# EAGLE board ShowStopper REV B (EAGLE 5.00)
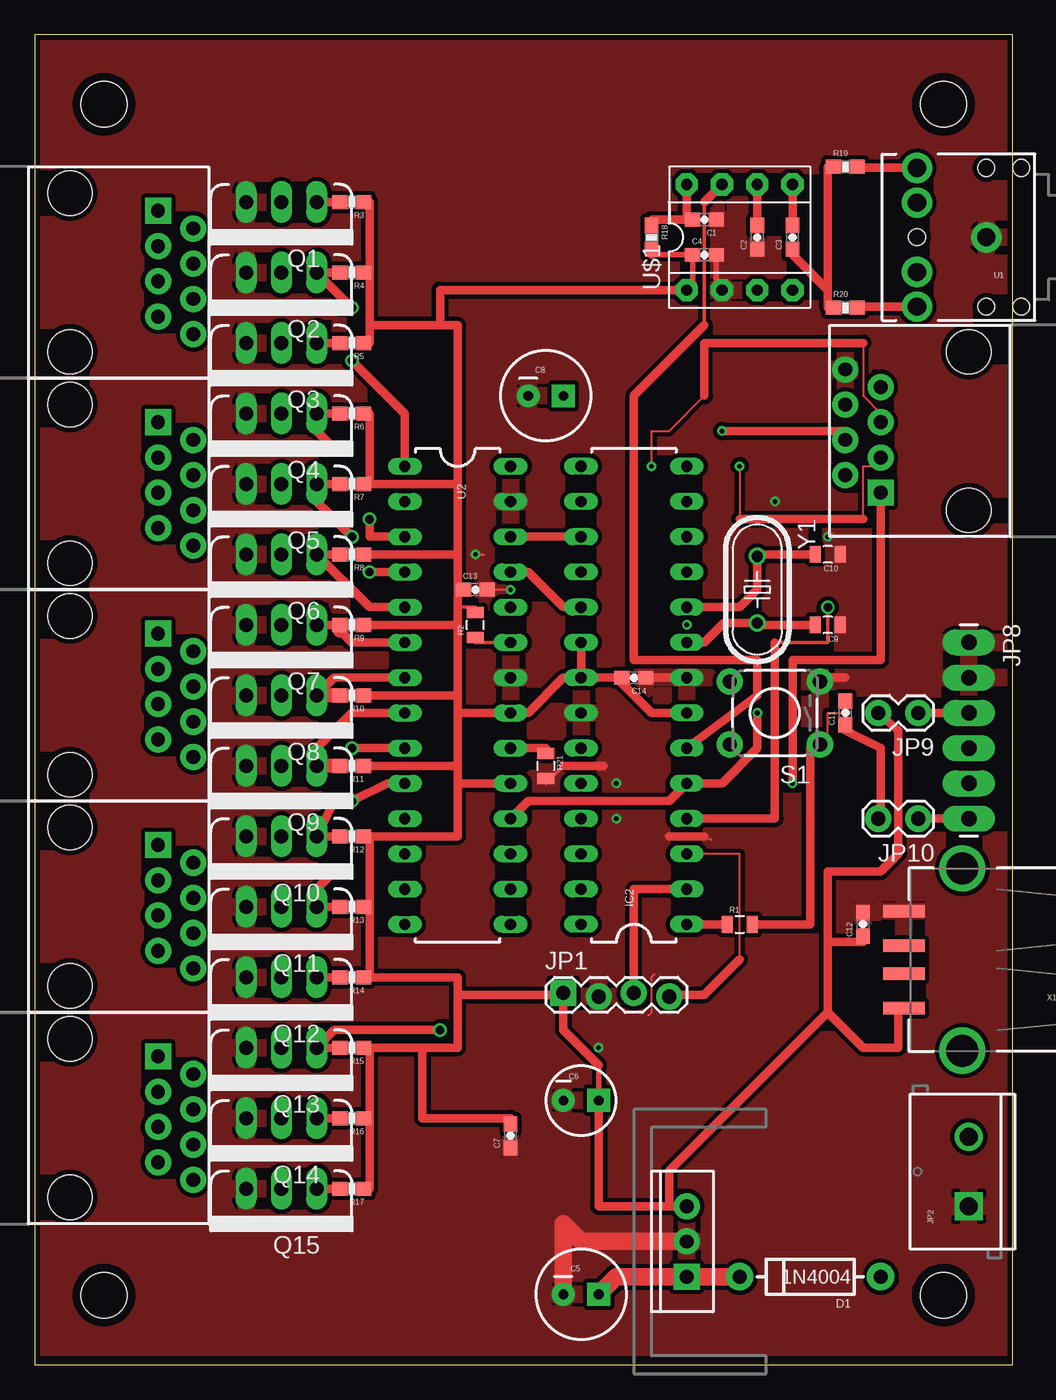
[diagram p0: board, top side]
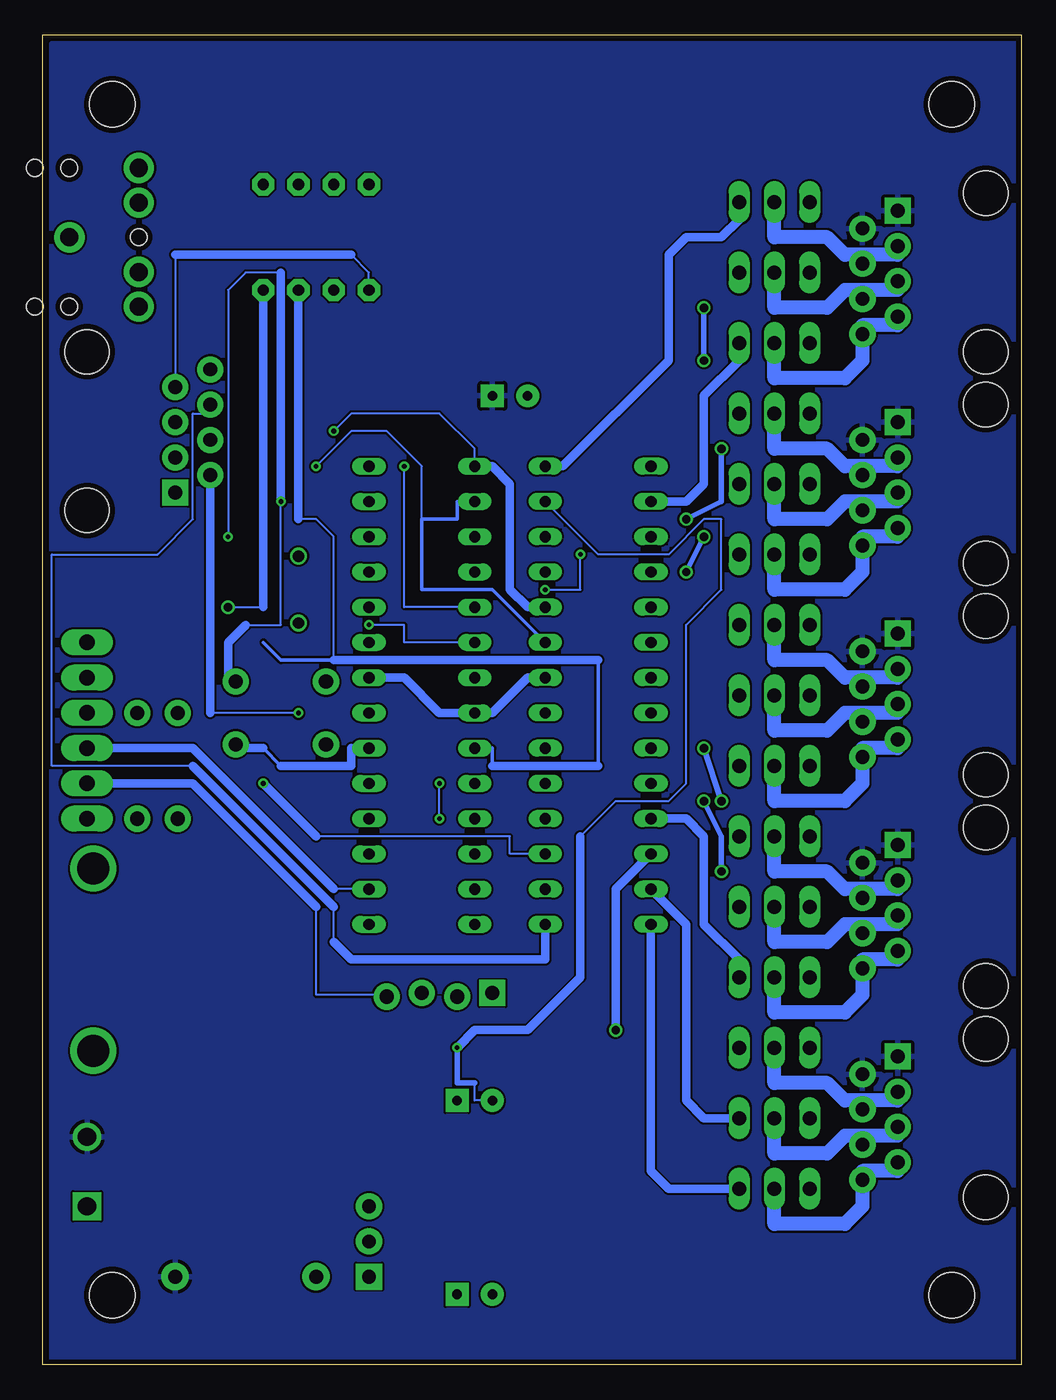
[diagram p1: board, bottom side, seen from below]

Size 70.48 x 95.89 mm. Coordinates in mm from the lower left corner, seen from the top.
Outline: 0,0 70.48,0 70.48,95.89 0,95.89 0,0
Copper layers (1*16): Top 0.0356mm / dielectric 1.5011mm / Bottom 0.0356mm
Design rules "LaenPCBOrder (1)": minimum track width 6mil, minimum drill 13mil, track to track 6mil, track to pad 6mil, pad to pad 6mil, via to via 6mil, smd to smd 6mil, copper to edge 15mil, drill to drill 6mil, minimum pad ring 7mil, minimum via ring 7mil, stop-mask expansion 4mil, vias tented up to drill 0mil, thermal gap 10mil

## Footprints (pad centres in the part's own frame; a part is rotated, then mirrored left to right if it is on the bottom)
0603-CAP = smd 1.1 x 1: 1 -0.85,0; 2 0.85,0
CPOL-RADIAL-100UF-25V = drill 0.7 pad 1.651 square: 1 1.27,0 | drill 0.7 pad 1.651 round: 2 -1.27,0
CPOL-RADIAL-10UF-25V = drill 0.7 pad 1.651 square: 1 1.27,0 | drill 0.7 pad 1.651 round: 2 -1.27,0
0805 = smd 0.8 x 1.2: 1 -0.9,0; 2 0.9,0
DIODE-1N4001 = drill 1 pad 1.981 round: A -5.08,0; C 5.08,0
RJ45-8 = drill 1 pad 1.88 square: 1 -4.445,6.35 | drill 1 pad 1.88 round: 2 -3.175,8.89; 3 -1.905,6.35; 4 -0.635,8.89; 5 0.635,6.35; 6 1.905,8.89; 7 3.175,6.35; 8 4.445,8.89 | hole 3.2: -5.715,0; 5.715,0
TO220-IGO = drill 1 pad 1.88 round: GND 0,0; OUT 2.54,0 | drill 1 pad 1.88 square: IN -2.54,0
DIL28-3 = drill 0.813 long: 1 -16.51,-3.81; 2 -13.97,-3.81; 3 -11.43,-3.81; 4 -8.89,-3.81; 5 -6.35,-3.81; 6 -3.81,-3.81; 7 -1.27,-3.81; 8 1.27,-3.81; 9 3.81,-3.81; 10 6.35,-3.81; 11 8.89,-3.81; 12 11.43,-3.81; 13 13.97,-3.81; 14 16.51,-3.81; 15 16.51,3.81; 16 13.97,3.81; 17 11.43,3.81; 18 8.89,3.81; 19 6.35,3.81; 20 3.81,3.81; 21 1.27,3.81; 22 -1.27,3.81; 23 -3.81,3.81; 24 -6.35,3.81; 25 -8.89,3.81; 26 -11.43,3.81; 27 -13.97,3.81; 28 -16.51,3.81
1X04_LOCK = drill 1.016 pad 1.88 square: 1 0,0.127 | drill 1.016 pad 1.88 round: 2 2.54,-0.127; 3 5.08,0.127; 4 7.62,-0.127
SCREWTERMINAL-5MM-2 = drill 1.3 pad 2.032 square: 1 0,0 | drill 1.3 pad 2.032 round: 2 5,0
STAND-OFF = hole 3.302: 0,0
1X06_LONGPADS = drill 1.118 pad 1.88 long: 1 0,0; 2 2.54,0; 3 5.08,0; 4 7.62,0; 5 10.16,0; 6 12.7,0
1X02_LOCK = drill 1.016 pad 1.88 round: 1 -0.178,0; 2 2.718,0
TO220V = drill 1.016 long: 1 -2.54,0; 2 0,0; 3 2.54,0
0603-RES = smd 1.1 x 1: 1 -0.85,0; 2 0.85,0
TACTILE-PTH = drill 1.016 pad 1.88 round: 1 -3.251,2.261; 2 3.251,2.261; 3 -3.251,-2.261; 4 3.251,-2.261
AUDIO-JACK = drill 1.3 pad 2.184 round: RING 5,5; RSH 5,2.5; SLEEVE 0,0; TIP 5,-5; TSH 5,-2.5 | hole 1.2: 0,5; -2.5,5; -2.5,-5; 0,-5; 5,0
DIL08 = drill 0.813 pad 1.6 octagon: 1 -3.81,-3.81; 2 -1.27,-3.81; 3 1.27,-3.81; 4 3.81,-3.81; 5 3.81,3.81; 6 1.27,3.81; 7 -1.27,3.81; 8 -3.81,3.81
USB-A-S-SILK-FEMALE = smd 3 x 0.9: D+ 7.212,-1; D- 7.212,1; GND 7.212,-3.5; VBUS 7.212,3.5 | drill 2.311 round: P$5 3,-6.566; P$6 3,6.566
HC49U-V = drill 0.813 round: 1 -2.413,0; 2 2.413,0

## Placement (x,y rotation side)
C1  33pf  [0603-CAP]  48.26,82.55 180 top
C2  .1uf  [0603-CAP]  52.07,81.28 90 top
C3  .01uf  [0603-CAP]  54.61,81.28 90 top
C4  .1uf  [0603-CAP]  48.26,80.01 0 top
C5  100uf  [CPOL-RADIAL-100UF-25V]  39.37,5.08 0 top
C6  10uf  [CPOL-RADIAL-10UF-25V]  39.37,19.05 0 top
C7  .1uf  [0603-CAP]  34.29,16.51 90 top
C8  100uf  [CPOL-RADIAL-100UF-25V]  36.83,69.85 0 top
C9  22PF  [0805]  57.15,53.34 180 top
C10  22PF  [0805]  57.15,58.42 180 top
C11  .1uf  [0603-CAP]  58.42,46.99 90 top
C12  .1uf  [0603-CAP]  59.69,31.75 90 top
C13  .1uf  [0603-CAP]  31.75,55.88 0 top
C14  .1uf  [0603-CAP]  43.18,49.53 180 top
D1  1N4004  [DIODE-1N4001]  55.88,6.35 180 top
EXT  RJ45-8PTH  [RJ45-8]  67.31,67.31 90 top
IC1  LM7805  [TO220-IGO]  46.99,8.89 90 top
IC2  AVR-MEGA8-PPTH  [DIL28-3]  43.18,48.26 90 top
JP1  BT  [1X04_LOCK]  38.1,26.67 0 top
JP2  [SCREWTERMINAL-5MM-2]  67.31,11.43 90 top
JP4  STAND-OFF  [STAND-OFF]  65.49,90.87 0 top
JP5  STAND-OFF  [STAND-OFF]  4.99,90.87 0 top
JP6  STAND-OFF  [STAND-OFF]  4.99,5.02 0 top
JP7  STAND-OFF  [STAND-OFF]  65.49,5.02 0 top
JP8  [1X06_LONGPADS]  67.31,52.07 270 top
JP9  [1X02_LOCK]  63.5,46.99 180 top
JP10  [1X02_LOCK]  63.5,39.37 180 top
Q1  [TO220V]  17.78,83.82 180 top
Q2  [TO220V]  17.78,78.74 180 top
Q3  [TO220V]  17.78,73.66 180 top
Q4  [TO220V]  17.78,68.58 180 top
Q5  [TO220V]  17.78,63.5 180 top
Q6  [TO220V]  17.78,58.42 180 top
Q7  [TO220V]  17.78,53.34 180 top
Q8  [TO220V]  17.78,48.26 180 top
Q9  [TO220V]  17.78,43.18 180 top
Q10  [TO220V]  17.78,38.1 180 top
Q11  [TO220V]  17.78,33.02 180 top
Q12  [TO220V]  17.78,27.94 180 top
Q13  [TO220V]  17.78,22.86 180 top
Q14  [TO220V]  17.78,17.78 180 top
Q15  [TO220V]  17.78,12.7 180 top
R1  10k  [0805]  50.8,31.75 0 top
R2  10k  [0805]  31.75,53.34 90 top
R3  10k  [0603-RES]  22.86,83.82 180 top
R4  10k  [0603-RES]  22.86,78.74 180 top
R5  10k  [0603-RES]  22.86,73.66 180 top
R6  10k  [0603-RES]  22.86,68.58 180 top
R7  10k  [0603-RES]  22.86,63.5 180 top
R8  10k  [0603-RES]  22.86,58.42 180 top
R9  10k  [0603-RES]  22.86,53.34 180 top
R10  10k  [0603-RES]  22.86,48.26 180 top
R11  10k  [0603-RES]  22.86,43.18 180 top
R12  10k  [0603-RES]  22.86,38.1 180 top
R13  10k  [0603-RES]  22.86,33.02 180 top
R14  10k  [0603-RES]  22.86,27.94 180 top
R15  10k  [0603-RES]  22.86,22.86 180 top
R16  10k  [0603-RES]  22.86,17.78 180 top
R17  10k  [0603-RES]  22.86,12.7 180 top
R18  200k  [0603-RES]  44.45,81.28 270 top
R19  22k  [0603-RES]  58.42,86.36 0 top
R20  22k  [0603-RES]  58.42,76.2 0 top
R21  2.2K  [0805]  36.83,43.18 270 top
S1  SWITCH-MOMENTARY-2PTH  [TACTILE-PTH]  53.34,46.99 180 top
U1  AUD0  [AUDIO-JACK]  68.58,81.28 180 top
U2  TLC5940-NT  [DIL28-3]  30.48,48.26 270 top
U$1  MSGEQ7_PTH  [DIL08]  50.8,81.28 0 top
U$3  RJ45-8PTH  [RJ45-8]  2.54,78.74 270 top
U$4  RJ45-8PTH  [RJ45-8]  2.54,63.5 270 top
U$5  RJ45-8PTH  [RJ45-8]  2.54,48.26 270 top
U$6  RJ45-8PTH  [RJ45-8]  2.54,33.02 270 top
U$7  RJ45-8PTH  [RJ45-8]  2.54,17.78 270 top
X1  USB_  [USB-A-S-SILK-FEMALE]  69.85,29.21 180 top
Y1  XTAL  [HC49U-V]  52.07,55.88 270 top

## Library data of the parts
C1-C14 D1 EXT IC1 IC2 JP1 JP2 JP4-JP10 Q1-Q15 R1-R21 S1 U1 U2 U$1 U$3-U$7 X1 Y1 = SparkFun

## Nets
ANALOG0: IC2.23 U$1.3
BLANK: EXT.3 IC2.16 R2.1 U2.23
GND: C1.1 C2.1 C4.2 C5.2 C6.2 C7.1 C8.2 C9.1 C10.1 C12.2 C13.2 C14.1 EXT.8 IC1.GND IC2.8 IC2.22 JP1.2 JP2.1 JP8.1 JP8.2 Q1.3 Q2.3 Q3.3 Q4.3 Q5.3 Q6.3 Q7.3 Q8.3 Q9.3 Q10.3 Q11.3 Q12.3 Q13.3 Q14.3 Q15.3 R21.2 S1.3 U1.SLEEVE U2.22 U2.27 U$1.2 X1.GND
GSCLK: EXT.2 IC2.5 U2.18
LEFT: R19.2 U1.TIP
N$1: Q7.2 U$5.3 U$5.4
N$2: Q2.2 U$3.5 U$3.6
N$3: Q3.2 U$3.7 U$3.8
N$4: Q10.2 U$6.3 U$6.4
N$5: Q9.1 R11.2 U2.8
N$6: Q2.1 R4.2 U2.1
N$7: Q3.1 R5.2 U2.2
N$8: Q4.1 R6.2 U2.3
N$9: Q5.2 U$4.5 U$4.6
N$10: Q5.1 R7.2 U2.4
N$11: Q6.1 R8.2 U2.5
N$12: Q7.1 R9.2 U2.6
N$13: Q8.1 R10.2 U2.7
N$14: C9.2 IC2.9 Y1.2
N$15: Q10.1 R12.2 U2.9
N$16: Q11.1 R13.2 U2.10
N$17: Q12.1 R14.2 U2.11
N$18: Q13.1 R15.2 U2.12
N$19: Q14.1 R16.2 U2.13
N$20: Q15.1 R17.2 U2.14
N$21: Q6.2 U$4.7 U$4.8
N$22: Q13.2 U$7.3 U$7.4
N$23: Q8.2 U$5.5 U$5.6
N$24: C1.2 R18.1 U$1.8
N$25: Q9.2 U$5.7 U$5.8
N$26: Q14.2 U$7.5 U$7.6
N$27: Q11.2 U$6.5 U$6.6
N$28: C3.2 U$1.5
N$29: Q12.2 U$6.7 U$6.8
N$30: Q15.2 U$7.7 U$7.8
N$31: Q1.2 U$3.3 U$3.4
N$32: C2.2 U$1.6
N$33: Q4.2 U$4.3 U$4.4
N$34: Q1.1 R3.2 U2.28
N$35: R21.1 U2.20
N$36: C3.1 R19.1 R20.1
N$37: C10.2 IC2.10 Y1.1
N$38: C11.1 JP10.2
N$39: JP8.3 JP9.1
N$40: C5.1 D1.C IC1.IN
N$41: JP8.6 JP10.1
N$43: IC2.1 R1.1
OUT15: EXT.6 U2.15
RIGHT: R20.2 U1.RING
RST: C11.2 IC2.6 R1.2 S1.1 U$1.7
RXD: IC2.3 JP1.4 JP8.5
SCK: EXT.5 IC2.19 U2.25
SIN: IC2.17 U2.26
SOUT: EXT.1 U2.17
STROBE: IC2.4 U$1.4
TXD: IC2.2 JP1.3 JP8.4
V+: C8.1 D1.A JP2.2 U$3.1 U$3.2 U$4.1 U$4.2 U$5.1 U$5.2 U$6.1 U$6.2 U$7.1 U$7.2
VCC: C4.1 C6.1 C7.2 C12.1 C13.1 C14.2 EXT.7 IC1.OUT IC2.7 IC2.20 IC2.21 JP1.1 JP9.2 R2.2 R3.1 R4.1 R5.1 R6.1 R7.1 R8.1 R9.1 R10.1 R11.1 R12.1 R13.1 R14.1 R15.1 R16.1 R17.1 R18.2 U2.19 U2.21 U$1.1 X1.VBUS
XLAT: EXT.4 IC2.15 U2.24

## Tracks (layer width: path | path; a pad name or v marks a point on that pad's centre or on a via)
ANALOG0
  Bottom 0.152: 52.07,60.96 50.8,60.96 49.53,59.69 49.53,50.8
  Bottom 0.254: 38.1,43.18 38.1,44.45 IC2.23 | 30.48,43.18 30.48,50.8 | 49.53,50.8 53.34,50.8 54.61,52.07
  Bottom 0.61: 30.48,43.18 38.1,43.18 | 30.48,50.8 49.53,50.8 | 52.07,60.96 U$1.3
BLANK  (via drill 0.33)
  Top 0.152: 59.69,60.96 59.69,64.77 60.96,64.77 EXT.3 | v50.8,64.77 50.8,60.96
  Top 0.254: R2.1 31.75,52.07 U2.23
  Top 0.61: 50.8,60.96 59.69,60.96
  Bottom 0.152: v50.8,64.77 48.26,67.31 45.72,67.31 43.18,64.77 43.18,60.96
  Bottom 0.254: U2.23 38.1,55.88 43.18,55.88 43.18,60.96 40.64,60.96 40.64,62.23 IC2.16
GND  (via drill 0.33)
  Top 0.152: v40.64,22.86 40.88,23.11 | 44.66,28.14 44.45,27.94 44.45,25.4 44.24,25.2 | 45.46,38.1 45.72,38.1 | 48.26,38.1 48.77,37.85 | v31.75,58.42 32.38,58.4 | C13.2 v34.29,55.88 | S1.3 57.15,49.53 | v57.15,59.69 57.47,59.91
  Top 0.254: 38.1,43.18 36.83,41.91 R21.2
  Top 0.406: 49.11,77.89 C4.2
  Top 0.61: U$1.2 49.11,77.89 | 38.1,43.18 41.02,43.18 | 45.72,38.1 48.26,38.1 | IC2.8 C14.1 | 57.15,49.53 58.42,49.53
  Top 1.27: IC1.GND 39.37,8.89 38.1,10.16 C5.2
  Bottom 0.152: v41.91,39.37 v41.91,41.91 | 39.37,20.32 39.37,19.05 C6.2 | 31.75,38.1 29.21,40.64 25.4,40.64 24.13,41.91 24.13,53.34 21.59,55.88 21.59,60.96 22.86,60.96 25.4,58.42 30.48,58.42 U2.27 | v31.75,58.42 31.75,55.88 v34.29,55.88 | 55.88,53.34 53.34,53.34 v53.34,62.23 | 53.34,78.74 55.88,78.74 57.15,77.47 v57.15,59.69
  Bottom 0.406: v40.64,22.86 40.64,20.32 39.37,20.32
  Bottom 0.61: U2.22 35.56,49.53 38.1,46.99 IC2.22 41.91,46.99 44.45,49.53 IC2.8 | v40.64,22.86 39.37,24.13 35.56,24.13 31.75,27.94 31.75,38.1 | 55.88,53.34 57.15,52.07 57.15,49.53 S1.3 | v53.34,62.23 53.34,78.74
  pour Top (isolate 0.305): 0,95.25 69.85,95.25 69.85,1.27 0,1.27
GSCLK  (via drill 0.33)
  Top 0.61: U2.18 35.56,40.64 45.72,40.64 IC2.5 49.53,41.91 52.07,44.45 v52.07,46.99
  Bottom 0.152: v52.07,46.99 58.42,46.99
  Bottom 0.61: 58.42,46.99 EXT.2
LEFT
  Top 0.61: R19.2 59.69,86.36 59.69,86.28 U1.TIP
N$1
  Bottom 1.016: Q7.2 17.78,50.8 13.97,50.8 12.7,49.53 11.43,49.53 | 11.43,49.53 8.89,49.53 U$5.3 | 11.43,49.53 U$5.4
N$2
  Bottom 1.016: Q2.2 17.78,76.2 13.97,76.2 12.7,77.47 11.43,77.47 | 11.43,77.47 8.89,77.47 U$3.5 | 11.43,77.47 U$3.6
N$3
  Bottom 1.016: Q3.2 17.78,71.12 12.7,71.12 11.43,72.39 U$3.8 11.43,74.93 8.89,74.93 U$3.7
N$4
  Bottom 1.016: Q10.2 17.78,35.56 13.97,35.56 12.7,34.29 11.43,34.29 | 11.43,34.29 8.89,34.29 U$6.3 | 11.43,34.29 U$6.4
N$5
  Top 0.61: R11.2 Q9.1 20.32,44.45 22.86,46.99 U2.8
  Top 1.016: R11.2 Q9.1
N$6  (via drill 0.6)
  Top 0.61: R4.2 Q2.1 v22.86,76.2 | U2.1 26.67,68.58 v22.86,72.39
  Bottom 0.406: v22.86,72.39 v22.86,76.2
N$7
  Top 0.61: Q3.1 R5.2
  Bottom 0.61: U2.2 24.13,62.23 22.86,63.5 22.86,69.85 20.32,72.39 Q3.1
N$8  (via drill 0.6)
  Top 0.61: R6.2 Q4.1 20.32,67.31 v21.59,66.04 | U2.3 24.13,59.69 v24.13,60.96
  Bottom 0.406: v24.13,60.96 21.59,62.23 v21.59,66.04
N$9
  Bottom 1.016: Q5.2 17.78,60.96 13.97,60.96 12.7,62.23 11.43,62.23 | 11.43,62.23 8.89,62.23 U$4.5 | 11.43,62.23 U$4.6
N$10  (via drill 0.6)
  Top 0.61: R7.2 Q5.1 20.32,62.23 v22.86,59.69 | v24.13,57.15 U2.4
  Bottom 0.406: v24.13,57.15 v22.86,59.69
N$11
  Top 0.61: R8.2 Q6.1 24.13,54.61 U2.5
N$12
  Top 0.61: R9.2 Q7.1 | 22.01,52.92 22.86,52.07 U2.6
  Top 1.016: 22.01,52.92 R9.2
N$13
  Top 0.61: R10.2 Q8.1 21.59,49.53 U2.7
  Top 1.016: R10.2 Q8.1
N$14
  Top 0.61: C9.2 52.07,53.34 Y1.2 49.66,53.47 48.26,52.07 IC2.9
N$15  (via drill 0.6)
  Top 0.61: R12.2 Q10.1 v21.59,40.64 | v22.86,44.45 U2.9
  Bottom 0.406: v21.59,40.64 v22.86,44.45
N$16  (via drill 0.6)
  Top 0.61: R13.2 Q11.1 20.32,34.29 v21.59,35.56 | U2.10 25.4,41.91 v22.86,40.64
  Bottom 0.406: v22.86,40.64 21.59,38.1 v21.59,35.56
N$17
  Top 0.61: R14.2 Q12.1
  Bottom 0.61: U2.11 24.13,39.37 22.86,38.1 22.86,31.75 20.32,29.21 Q12.1
N$18  (via drill 0.6)
  Top 0.61: R15.2 Q13.1 21.59,24.13 v29.21,24.13
  Bottom 0.61: U2.12 29.21,34.29 v29.21,24.13
N$19
  Top 0.61: R16.2 Q14.1
  Bottom 0.61: U2.13 24.13,31.75 24.13,19.05 22.86,17.78 Q14.1
N$20
  Top 0.61: R17.2 Q15.1
  Bottom 0.61: U2.14 26.67,13.97 25.4,12.7 Q15.1
N$21
  Bottom 1.016: Q6.2 17.78,55.88 12.7,55.88 11.43,57.15 U$4.8 11.43,59.69 8.89,59.69 U$4.7
N$22
  Bottom 1.016: Q13.2 17.78,20.32 13.97,20.32 12.7,19.05 11.43,19.05 | 11.43,19.05 8.89,19.05 U$7.3 | 11.43,19.05 U$7.4
N$23
  Bottom 1.016: Q8.2 17.78,45.72 13.97,45.72 12.7,46.99 11.43,46.99 | 11.43,46.99 8.89,46.99 U$5.5 | 11.43,46.99 U$5.6
N$24
  Top 0.61: U$1.8 46.99,82.55 C1.2 44.45,82.55 R18.1
N$25
  Bottom 1.016: Q9.2 17.78,40.64 12.7,40.64 11.43,41.91 U$5.8 11.43,44.45 8.89,44.45 U$5.7
N$26
  Bottom 1.016: Q14.2 17.78,15.24 13.97,15.24 12.7,16.51 11.43,16.51 | 11.43,16.51 8.89,16.51 U$7.5 | 11.43,16.51 U$7.6
N$27
  Bottom 1.016: Q11.2 17.78,30.48 13.97,30.48 12.7,31.75 11.43,31.75 | 11.43,31.75 8.89,31.75 U$6.5 | 11.43,31.75 U$6.6
N$28
  Top 0.61: C3.2 U$1.5
N$29
  Bottom 1.016: Q12.2 17.78,25.4 12.7,25.4 11.43,26.67 U$6.8 11.43,29.21 8.89,29.21 U$6.7
N$30
  Bottom 1.016: Q15.2 17.78,10.16 12.7,10.16 11.43,11.43 U$7.8 11.43,13.97 8.89,13.97 U$7.7
N$31
  Bottom 1.016: Q1.2 17.78,81.28 13.97,81.28 12.7,80.01 11.43,80.01 | 11.43,80.01 8.89,80.01 U$3.3 | 11.43,80.01 U$3.4
N$32
  Top 0.61: C2.2 U$1.6
N$33
  Bottom 1.016: Q4.2 17.78,66.04 13.97,66.04 12.7,64.77 11.43,64.77 | 11.43,64.77 8.89,64.77 U$4.3 | 11.43,64.77 U$4.4
N$34
  Top 0.61: Q1.1 R3.2
  Bottom 0.61: U2.28 33.02,64.77 25.4,72.39 25.4,80.01 24.13,81.28 21.59,81.28 20.32,82.55 Q1.1
N$35
  Top 0.61: R21.1 36.83,44.45 U2.20
N$36
  Top 0.152: 54.61,80.01 C3.1 | R20.1 57.15,76.2 | 57.15,86.36 R19.1
  Top 0.61: 57.15,77.47 54.61,80.01 | 57.15,76.2 57.15,77.47 | 57.15,77.47 57.15,86.36
N$37
  Top 0.61: C10.2 52.07,58.42 Y1.1 52.07,55.88 50.8,54.61 IC2.10
N$38
  Top 0.152: 58.42,45.72 C11.1 | JP10.2 60.96,39.37
  Top 0.61: 58.42,45.72 60.96,44.45 60.96,39.37
N$39
  Top 0.152: JP9.1 63.5,46.99
  Top 0.61: JP9.1 JP8.3
N$40
  Top 1.27: D1.C IC1.IN 41.91,6.35 C5.1
N$41
  Top 0.152: JP10.1 63.5,39.37
  Top 0.61: JP10.1 JP8.6
N$43
  Top 0.61: IC2.1 R1.1
OUT15
  Bottom 0.152: 49.53,30.48 49.53,33.02 | 59.69,43.18 69.85,43.18 69.85,58.42 62.23,58.42 59.69,60.96 59.69,68.58 58.42,68.58 EXT.6
  Bottom 0.61: U2.15 34.29,29.21 48.26,29.21 49.53,30.48 | 49.53,33.02 59.69,43.18
RIGHT
  Top 0.61: R20.2 59.69,76.2 59.69,76.28 U1.RING
RST
  Top 0.152: 57.15,44.45 57.15,46.99 58.42,46.99 C11.2 58.42,48.26
  Top 0.254: 55.88,44.45 S1.1 | 48.26,74.93 48.26,83.82
  Top 0.61: 55.88,44.45 55.88,31.75 R1.2 | IC2.6 52.07,48.26 52.07,50.8 43.18,50.8 43.18,69.85 48.26,74.93 | 48.26,83.82 U$1.7 | S1.1 57.15,44.45
  Bottom 0.254: 54.61,44.45 53.34,43.18 | 48.26,44.45 IC2.6
  Bottom 0.61: 48.26,44.45 48.26,43.18 53.34,43.18 | 54.61,44.45 55.88,44.45 S1.1
RXD
  Top 0.152: IC2.3 50.8,36.83 50.8,29.21 | JP1.4 45.72,26.67
  Top 0.61: 50.8,29.21 48.26,26.67 45.72,26.67
  Bottom 0.152: 50.8,33.02 50.8,26.67 45.72,26.67 JP1.4
  Bottom 0.61: 50.8,33.02 59.69,41.91 JP8.5
SCK  (via drill 0.33)
  Top 0.152: 59.69,73.66 59.69,69.85 60.96,68.58 EXT.5 | 48.26,69.85 45.72,67.31 44.45,67.31 v44.45,64.77
  Top 0.61: IC2.19 38.1,54.61 35.56,57.15 U2.25 | 59.69,73.66 48.26,73.66 48.26,69.85
  Bottom 0.152: v44.45,64.77 44.45,54.61 IC2.19
SIN
  Top 0.61: U2.26 IC2.17
SOUT  (via drill 0.33)
  Top 0.61: v54.61,41.91 54.61,50.8 60.96,50.8 EXT.1
  Bottom 0.152: U2.17 36.83,36.83 36.83,38.1 50.8,38.1
  Bottom 0.61: 50.8,38.1 v54.61,41.91
STROBE  (via drill 0.61)
  Top 0.254: 53.34,52.07 57.15,52.07 v57.15,54.61
  Top 0.61: 53.34,52.07 53.34,39.37 IC2.4
  Bottom 0.152: v57.15,54.61 54.61,54.61
  Bottom 0.61: 54.61,54.61 U$1.4
TXD
  Top 0.152: JP1.3 43.18,26.67
  Top 0.61: IC2.2 43.18,34.29 JP1.3
  Bottom 0.152: IC2.2 49.53,34.29
  Bottom 0.61: 49.53,34.29 59.69,44.45 JP8.4
V+
  pour Bottom: 0,95.25 69.85,95.25 69.85,0 0,0
VCC  (via drill 0.33)
  Top 0.152: 30.48,55.88 C13.1 | 59.69,30.48 C12.1 | 62.23,25.4 X1.VBUS
  Top 0.254: 34.29,17.78 C7.2 | 30.48,54.61 31.75,54.61 R2.2 | 38.1,26.67 JP1.1
  Top 0.406: 44.45,80.01 C4.1 47.41,77.89 | 40.64,21.59 C6.1
  Top 0.61: R3.1 24.13,83.82 24.13,78.74 | 24.13,78.74 R4.1 | R5.1 24.13,73.66 24.13,74.93 | 24.13,74.93 24.13,78.74 | R6.1 24.13,68.58 24.13,63.5 | 30.48,58.42 R8.1 | 30.48,58.42 30.48,63.5 | 24.13,63.5 R7.1 | 30.48,63.5 24.13,63.5 | 30.48,53.34 R9.1 | 30.48,53.34 30.48,54.61 30.48,55.88 30.48,58.42 | 30.48,48.26 R10.1 | 30.48,48.26 30.48,53.34 | 30.48,43.18 R11.1 | 30.48,43.18 30.48,46.99 | 30.48,46.99 30.48,48.26 | 30.48,46.99 U2.21 35.56,46.99 38.1,49.53 IC2.21 | 24.13,38.1 30.48,38.1 30.48,41.91 | 30.48,41.91 30.48,43.18 | 30.48,41.91 U2.19 | 24.13,38.1 R12.1 | 24.13,33.02 24.13,38.1 | 24.13,33.02 R13.1 | 24.13,27.94 24.13,33.02 | 24.13,22.86 27.94,22.86 | 27.94,22.86 30.48,22.86 30.48,26.67 | 30.48,26.67 30.48,27.94 24.13,27.94 | 24.13,27.94 R14.1 | 24.13,22.86 R15.1 | 24.13,17.78 24.13,22.86 | 24.13,17.78 R16.1 | R17.1 24.13,12.7 24.13,17.78 | IC2.21 IC2.20 | IC2.21 40.64,49.53 | 40.64,49.53 41.91,49.53 44.45,46.99 IC2.7 | 44.45,80.01 R18.2 | 47.41,77.89 U$1.1 29.21,77.47 29.21,74.93 | 34.29,17.78 27.94,17.78 27.94,22.86 | 30.48,26.67 38.1,26.67 38.1,24.13 40.64,21.59 | 29.21,74.93 30.48,74.93 30.48,63.5 | 29.21,74.93 24.13,74.93 | 40.64,49.53 C14.2 | 57.15,30.48 59.69,30.48 | 57.15,25.4 57.15,30.48 | 57.15,25.4 59.69,22.86 62.23,22.86 62.23,25.4 | 57.15,30.48 57.15,35.56 60.96,35.56 62.23,36.83 62.23,45.72 JP9.2 | 45.72,11.43 40.64,11.43 C6.1 | 45.72,11.43 IC1.OUT | 57.15,25.4 45.72,13.97 45.72,11.43
  Bottom 0.152: IC2.20 44.45,52.07 44.45,53.34 v46.99,53.34 | 48.26,80.01 46.99,78.74 U$1.1 | 60.96,80.01 EXT.7
  Bottom 0.61: 48.26,80.01 60.96,80.01
XLAT  (via drill 0.33)
  Top 0.152: 58.42,67.31 EXT.4
  Top 0.61: v49.53,67.31 58.42,67.31
  Bottom 0.152: v49.53,67.31 48.26,68.58 41.91,68.58 39.37,66.04 IC2.15
  Bottom 0.61: IC2.15 38.1,64.77 36.83,63.5 36.83,55.88 35.56,54.61 U2.24